# Altium PCB finalpcb.PcbDoc (part 1 of 2)
Units mm, origin at the board's own origin, x right, y up, seen from the top; angles counter-clockwise.
Board outline 242.29 x 217.3 mm, 4 copper layers (Top Layer, Layer 1, Layer 2, Bottom Layer), stack 0.563 mm thick; 53 components, 156 nets, 680 pads, 178 vias.
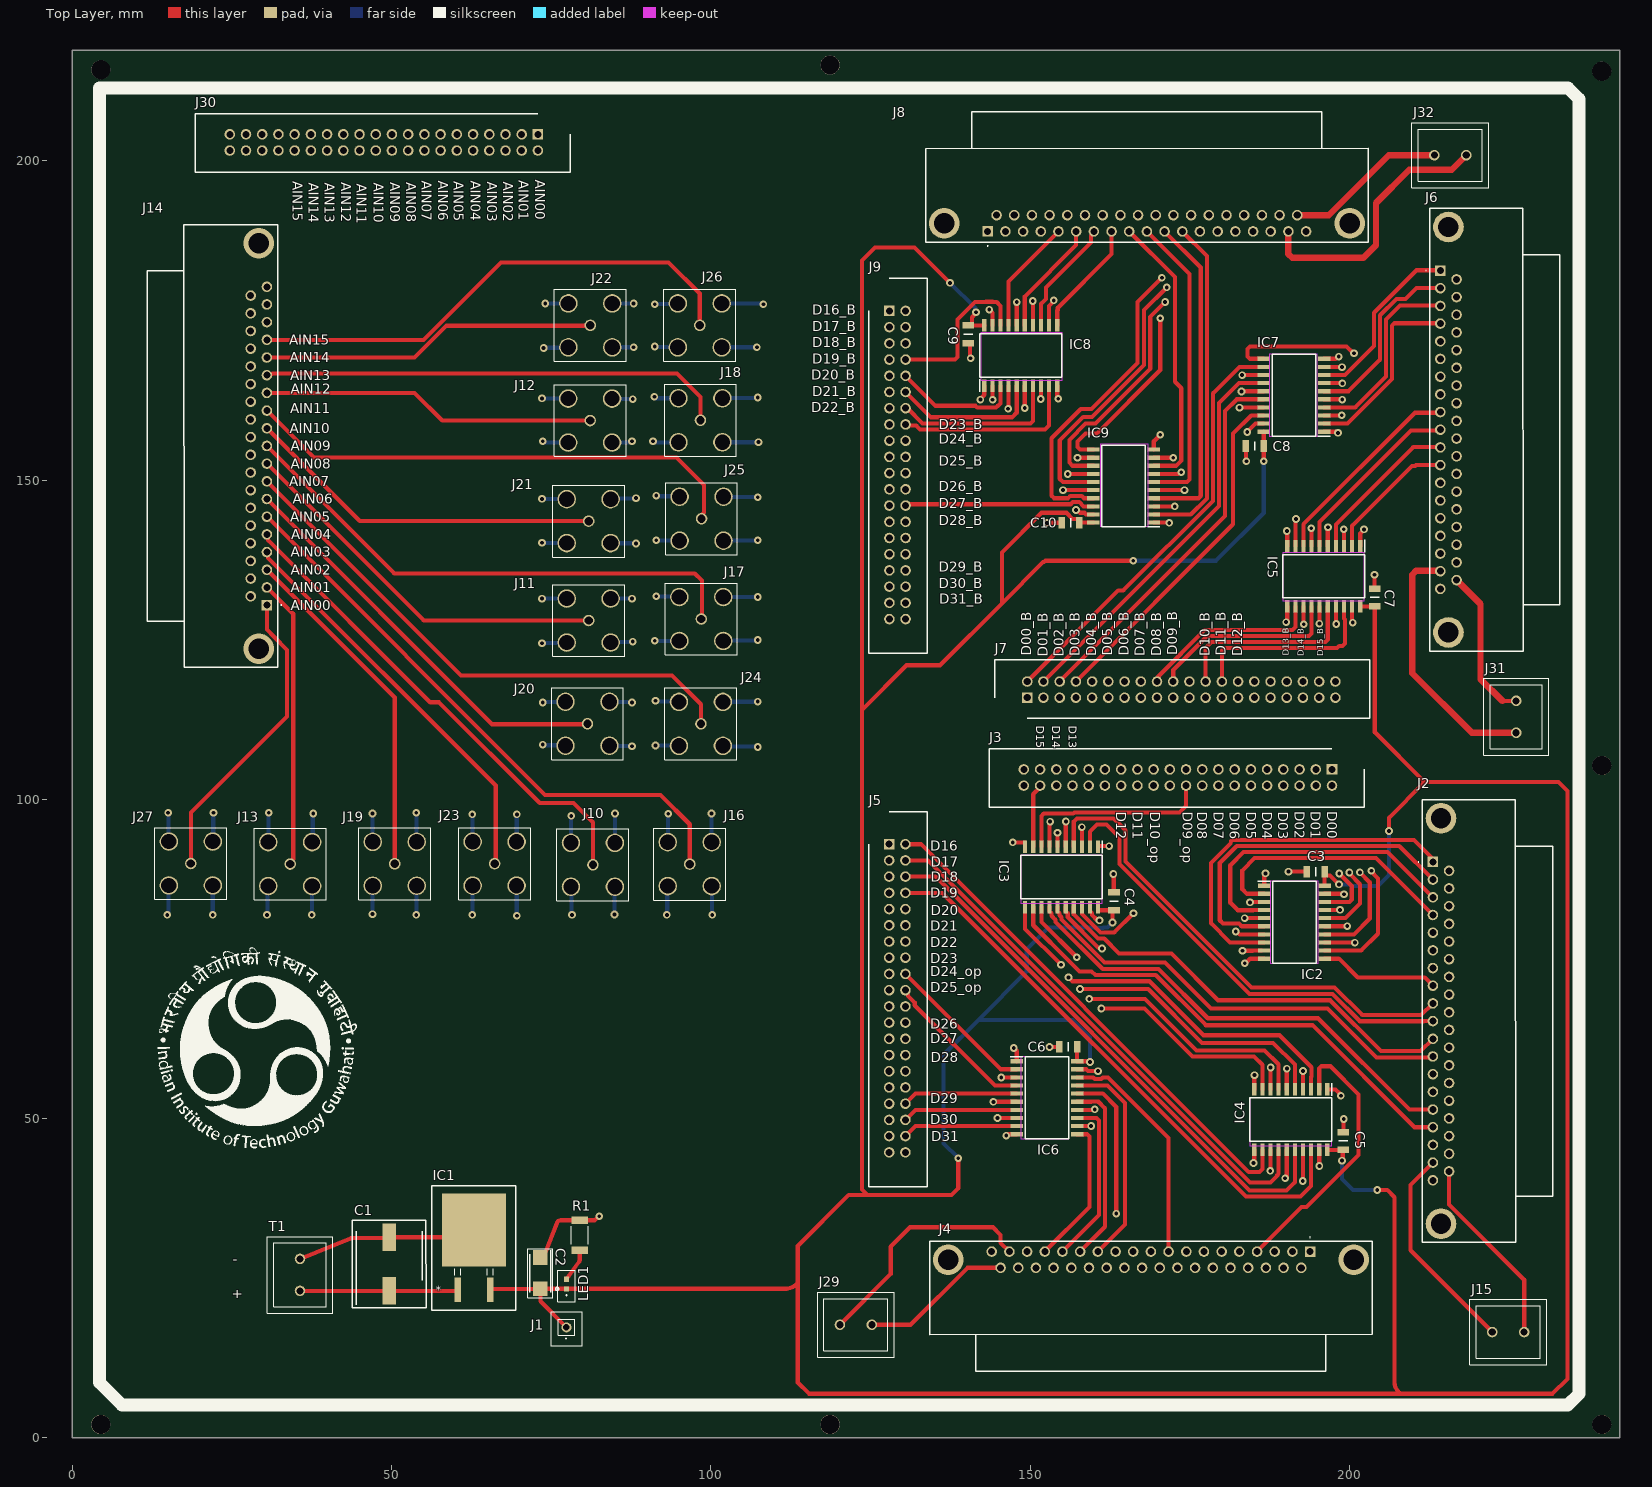
[diagram p0: Top Layer view]
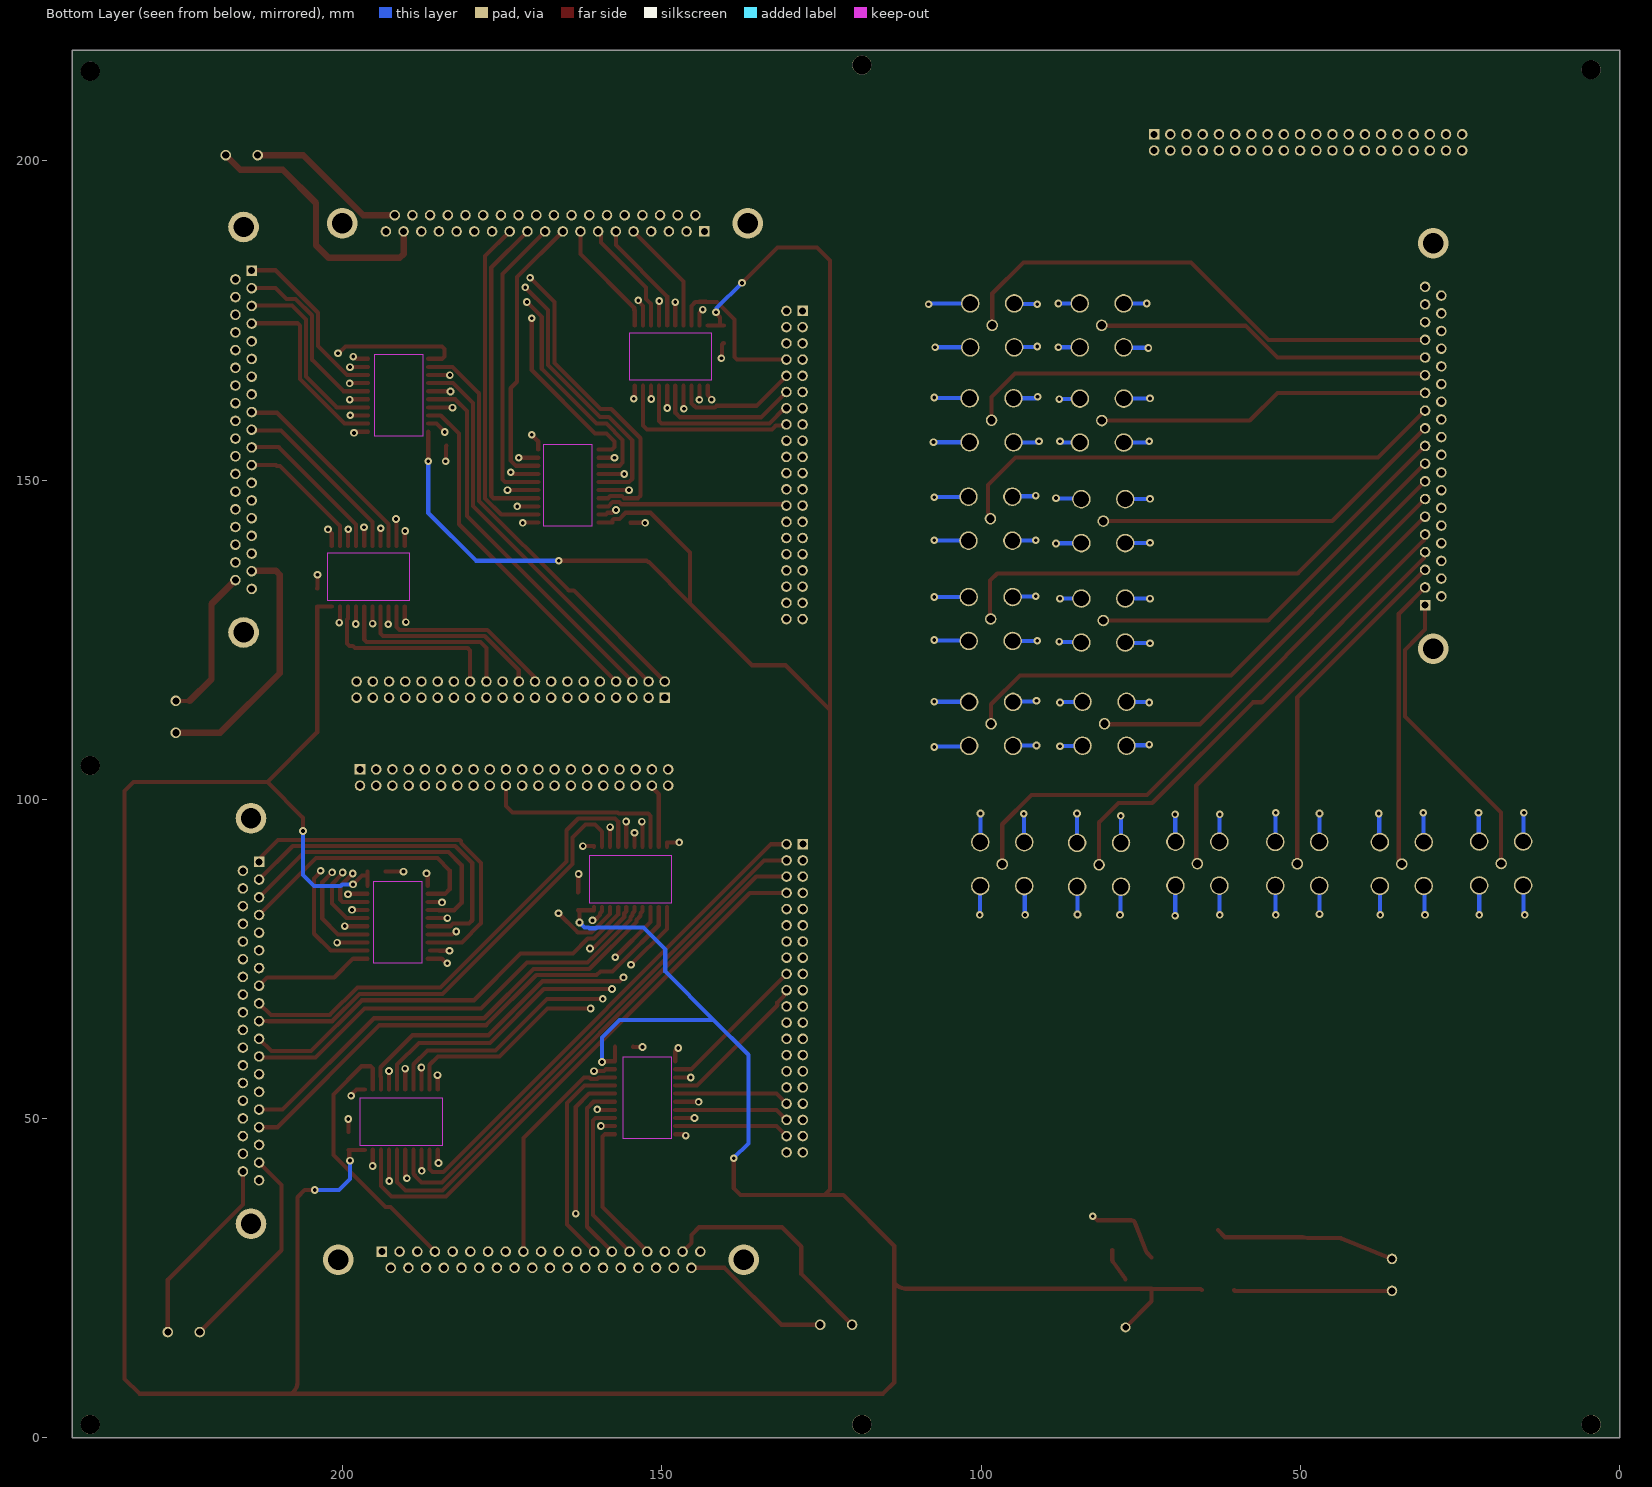
[diagram p1: Bottom Layer view, seen from below]
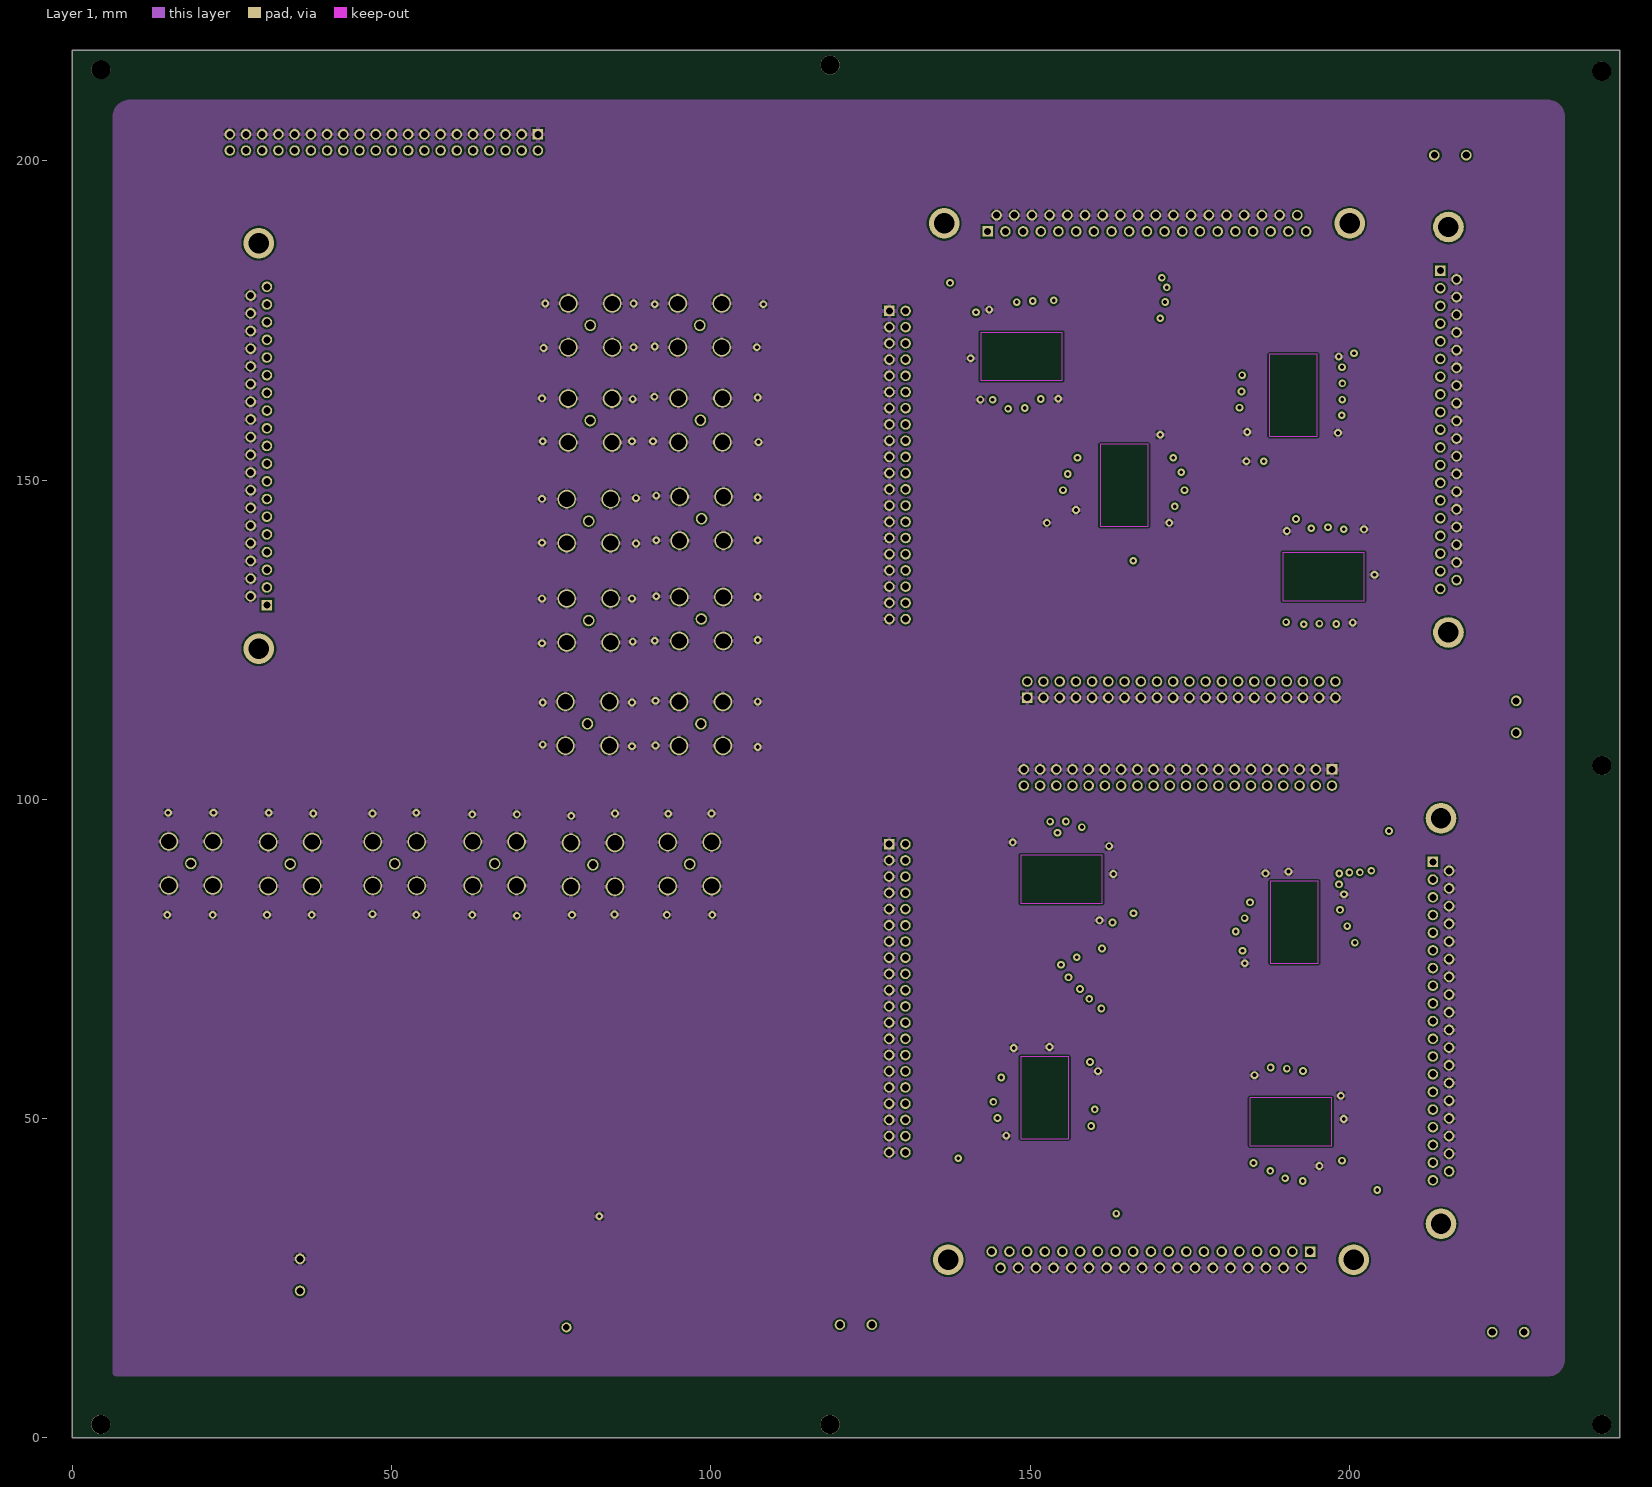
[diagram p2: Layer 1]
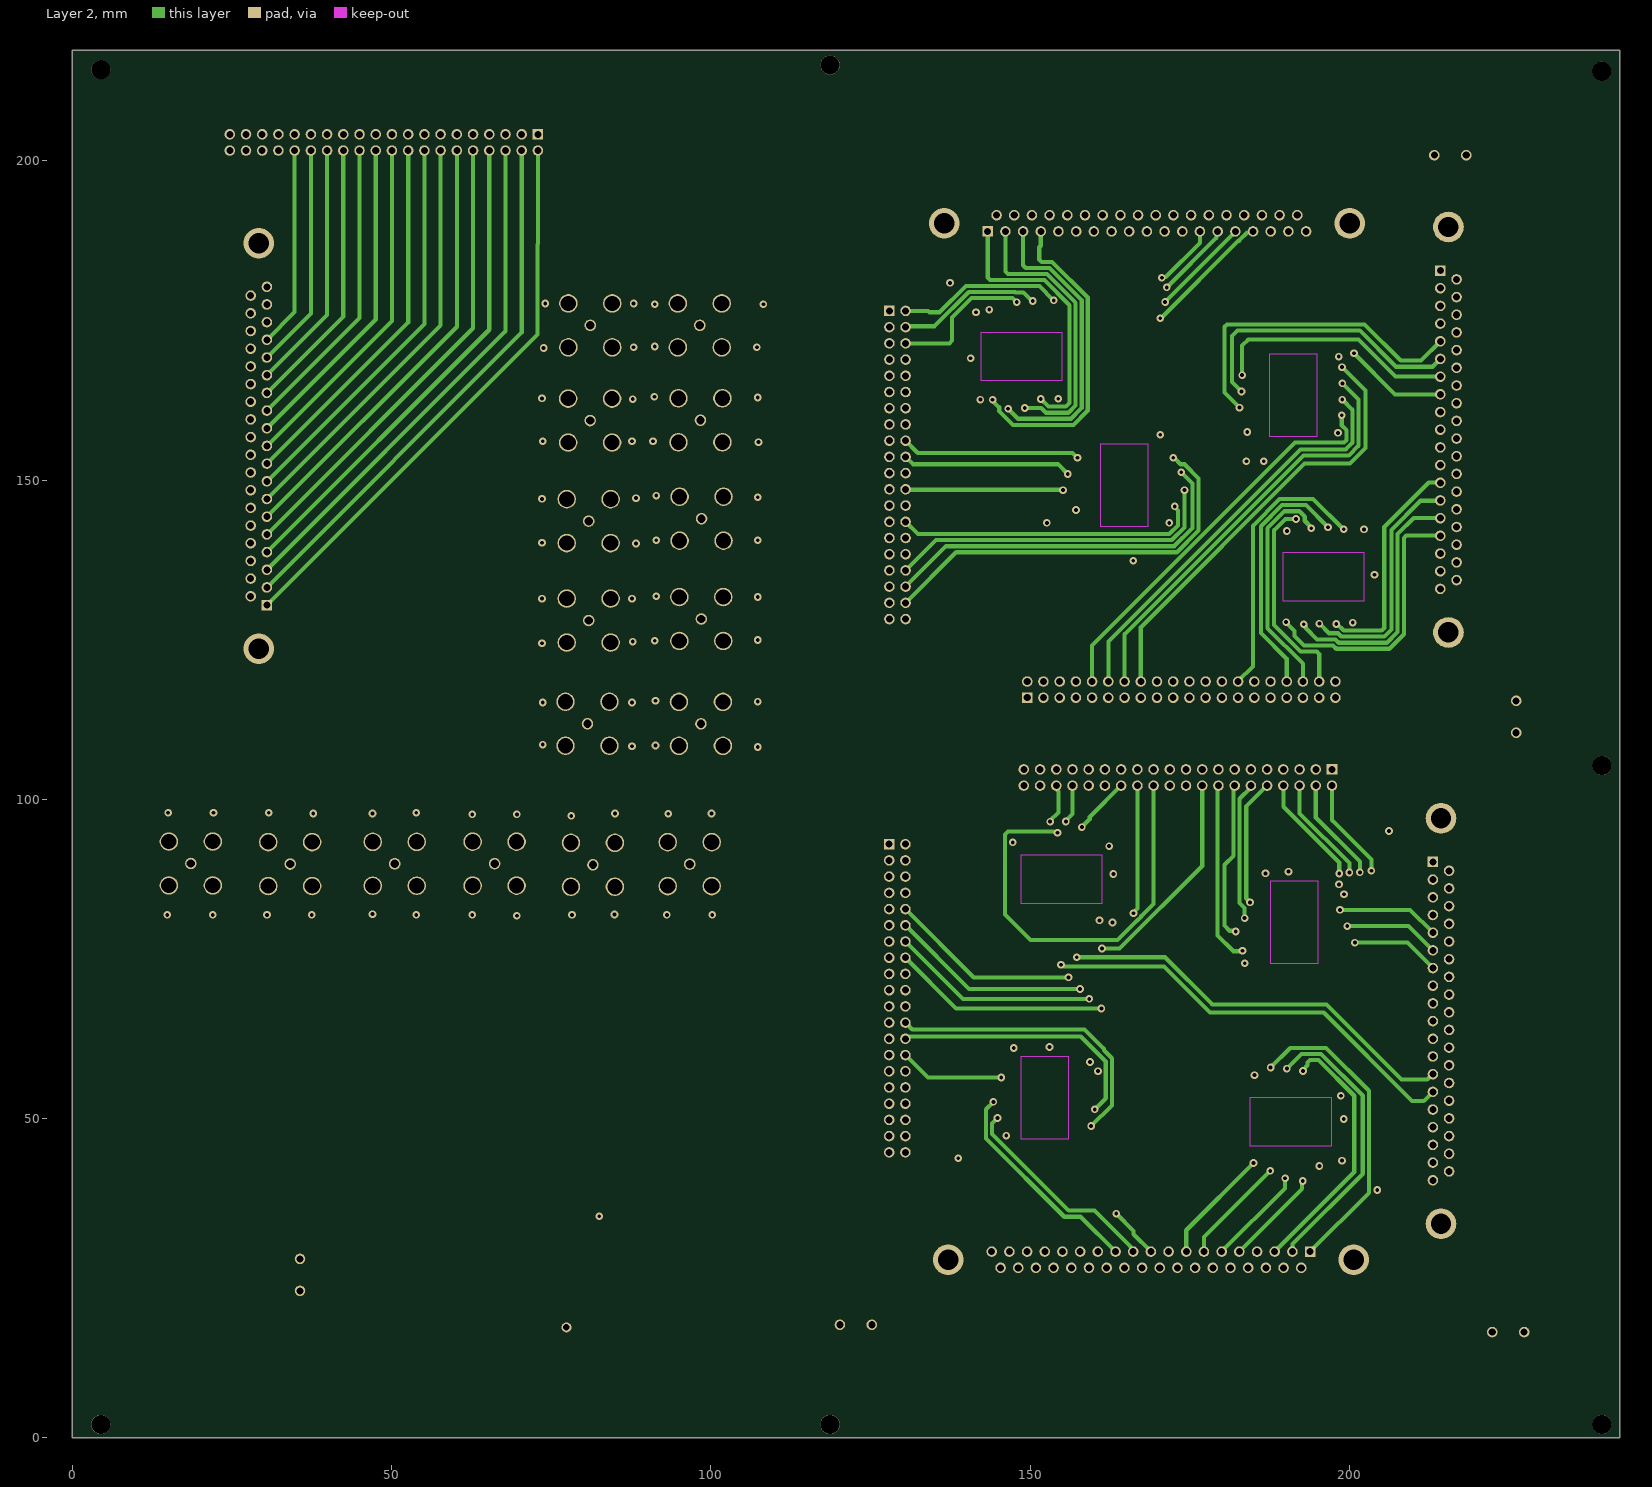
[diagram p3: Layer 2]
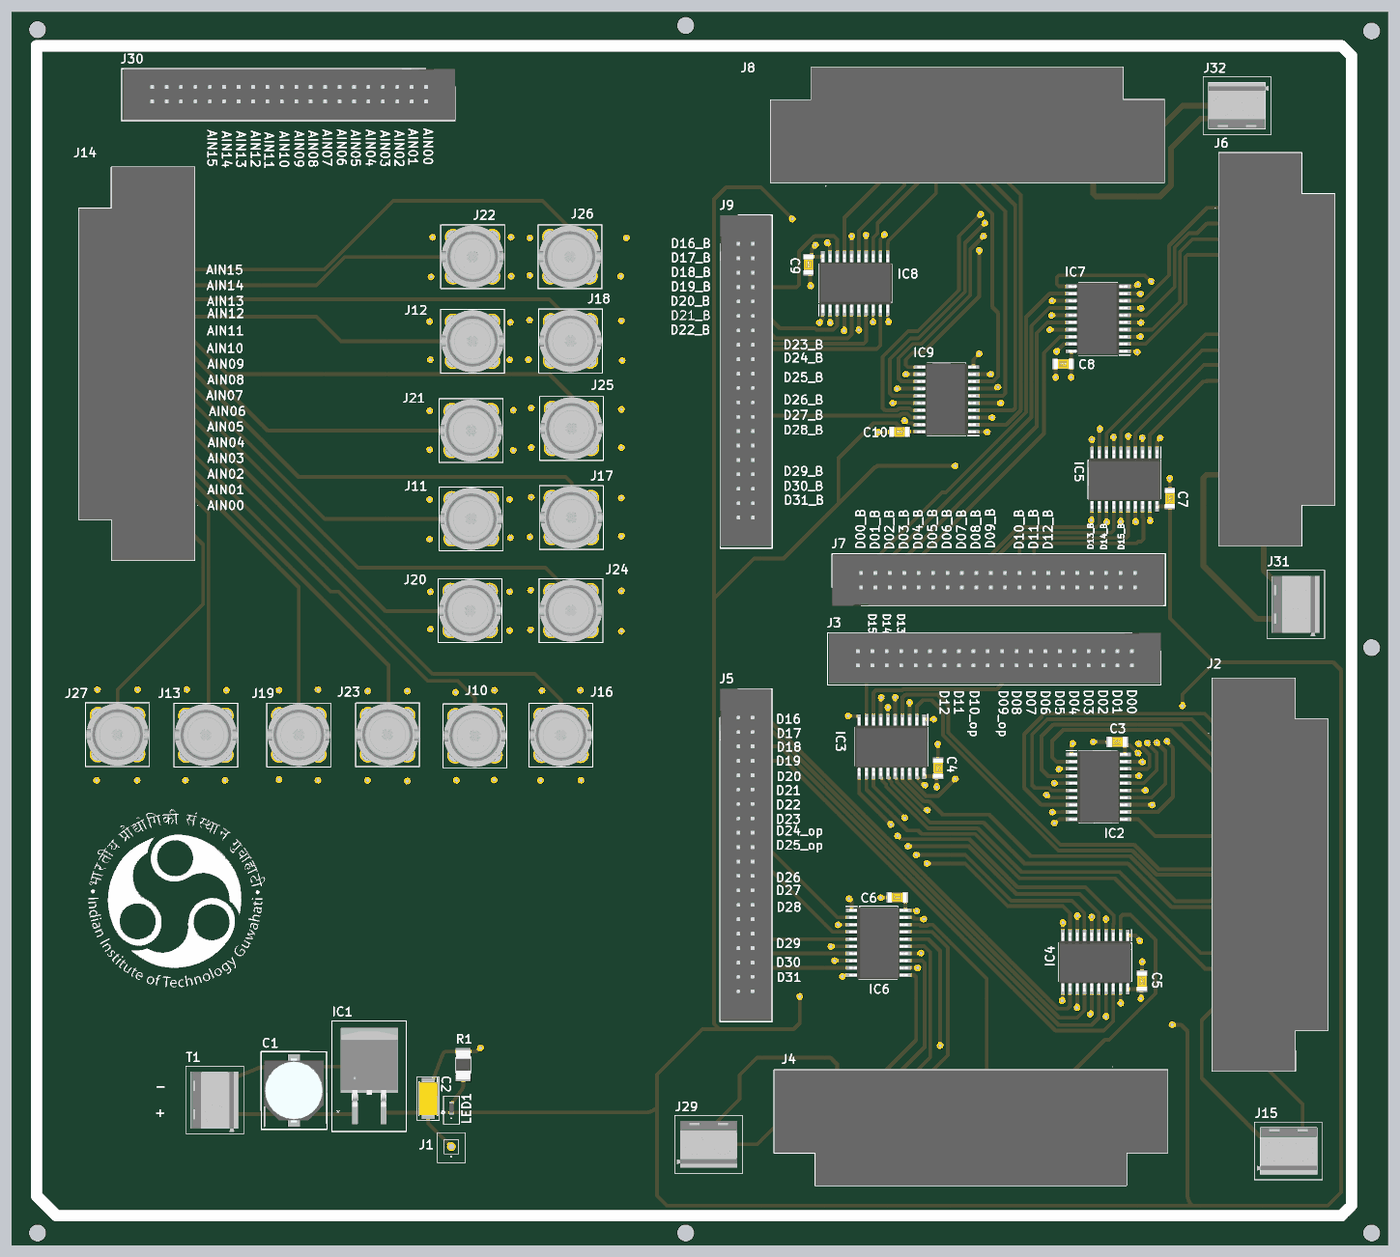
[diagram p5: 3D render of the assembled board from above, using the file's embedded part models]

## Layer stack, top to bottom
Top Solder: solder mask 0.0102, Solder Resist, Dk 3.5
Top Layer: signal copper 0.0356
Dielectric 1: prepreg 0.0508, PP-001, Dk 3.9
Layer 1: signal copper 0.035
Dielectric 2: dielectric 0.32, FR-4, Dk 4.8
Layer 2: signal copper 0.035
Dielectric 3: prepreg 0.0508, PP-001, Dk 3.9
Bottom Layer: signal copper 0.0356
Bottom Solder: solder mask 0.0102, Solder Resist, Dk 3.5

## Board outline
0,0 242.291,0 242.291,217.297 0,217.297

## Design rules (kind name [scope] priority, off if disabled: settings)
AssemblyTestpoint [All] p1: testpointundercomponent=TRUE minsize=1.016 maxsize=2.54 preferedsize=1.524 minholesize=0 maxholesize=1.016 preferedholesize=0.813 testpointgrid=0.025 usegrid=TRUE gridoriginx=6.668 gridoriginy=-50.431 gridtolerance=0 allowsidetop=TRUE allowsidebottom=TRUE
Clearance [All] p1: gap=0.3 ignorepadtopadclearanceinfootprint=FALSE
FabricationTestpoint [All] p1: side=3 testpointundercomponent=TRUE minsize=1.016 maxsize=2.54 preferedsize=1.524 minholesize=0 maxholesize=1.016 preferedholesize=0.813 testpointgrid=0.025 allowsidetop=TRUE allowsidebottom=TRUE usegrid=TRUE gridoriginx=6.668 gridoriginy=-50.431 gridtolerance=0
HoleSize [All] p1: absolutevalues=TRUE maxlimit=3.3 minlimit=0.025 maxpercent=80.000 minpercent=20.000
MinimumAnnularRing [All] p1: minimumring=0.125
MinimumSolderMaskSliver [All] p1: minsoldermaskwidth=0.15
PolygonConnect [All] p1: connectstyle=Relief reliefconductorwidth=0.654 reliefentries=4 polygonreliefangle="90 Angle" airgapwidth=0.254
RoutingVias [All] p1: holewidth=0.6 width=1.2 viastyle="Through Hole" minholewidth=0.5 minwidth=1 maxholewidth=0.711 maxwidth=1.27
SilkToSolderMaskClearance [IsPad] p1: minsilkscreentomaskgap=0.1 clearancetoexposedcopper=TRUE
SolderMaskExpansion [All] p1: expansion=0.102 istentingtop=FALSE
SupplyNets "Schematic Supply Nets" [InNet('GND_R')] p1: voltage=0.000
Width [All] p1: maxlimit=2 minlimit=0.55 preferedwidth=0.65 minimp=50.000000 maximp=50.000000 favimp=50.000000
25 further rules are at their usual default settings.

## Classes and differential pairs
component class pulsewidth2: C7 C8 C9 C10 IC5 IC7 IC8 IC9 J6 J7 J8 J9 J31 J32
component class pulsewidth1: C3 C4 C5 C6 IC2 IC3 IC4 IC6 J2 J3 J4 J5 J15 J29
component class power_supply: C1 C2 IC1 J1 LED1 R1 T1
component class Analog_1_16: J10 J11 J12 J13 J14 J16 J17 J18 J19 J20 J21 J22 J23 J24 J25 J26 J27 J30

## Components (designator, comment, footprint, x,y, rotation, side; value= is the part's Value field where it differs from the comment)
C1 "UUX2A470MNL1GS" CAPAE1030X1050N 49.606,27.238 r90 top value=47µF
C2 "TPSC106K025R0500" CAPPM6032X280N 73.279,25.806 r270 top value=10µF
C3 "C1206C104K5RACTU7990" CAPC3216X88N 194.689,88.697 r180 top
C4 "C1206C104K5RACTU7990" CAPC3216X88N 163.119,84.049 r90 top
C5 "C1206C104K5RACTU7990" CAPC3216X88N 199.034,46.507 r90 top
C6 "C1206C104K5RACTU7990" CAPC3216X88N 155.928,61.265 r180 top
C7 "C1206C104K5RACTU7990" CAPC3216X88N 203.962,131.625 r90 top
C8 "C1206C104K5RACTU7990" CAPC3216X88N 185.162,155.346 r180 top
C9 "C1206C104K5RACTU7990" CAPC3216X88N 140.284,172.845 r270 top
C10 "C1206C104K5RACTU7990" CAPC3216X88N 156.312,143.358 r180 top
IC1 "MC7805CDTG" MC7915ACD2TG 62.89,32.512 r0 top
IC2 "SN74AHC244DW" SOIC127P1030X265-20N 191.364,80.772 r0 top
IC3 "SN74AHC244DW" SOIC127P1030X265-20N 154.915,87.859 r270 top
IC4 "SN74AHC244DW" SOIC127P1030X265-20N 190.805,49.86 r270 top
IC5 "SN74AHC244DW" SOIC127P1030X265-20N 195.961,134.95 r270 top
IC6 "SN74AHC244DW" SOIC127P1030X265-20N 152.603,53.289 r0 top
IC7 "SN74AHC244DW" SOIC127P1030X265-20N 191.287,163.297 r180 top
IC8 "SN74AHC244DW" SOIC127P1030X265-20N 148.514,169.52 r90 top
IC9 "SN74AHC244DW" SOIC127P1030X265-20N 164.617,149.073 r180 top
J1 "TSW-101-07-G-S" TSW-101-XX-YY-S 77.368,17.323 r0 top
J2 "L77SDC37S1ACH3R" L77SDC37S1ACH3R 213.055,90.213 r90 top
J3 "T821140A1S100CEU" SHDR40W64P254X254_2X20_5842X895X915P 197.256,104.699 r180 top
J4 "L77SDC37S1ACH3R" L77SDC37S1ACH3R 193.827,29.185 r0 top
J5 "T821140A1S100CEU" SHDR40W64P254X254_2X20_5842X895X915P 127.914,92.989 r270 top
J6 "L77SDC37S1ACH3R" L77SDC37S1ACH3R 214.224,182.83 r90 top
J7 "T821140A1S100CEU" SHDR40W64P254X254_2X20_5842X895X915P 149.53,115.926 r0 top
J8 "L77SDC37S1ACH3R" L77SDC37S1ACH3R 143.341,188.951 r180 top
J9 "T821140A1S100CEU" SHDR40W64P254X254_2X20_5842X895X915P 127.94,176.505 r270 top
J10 "031-5329-51RFX" CONN1_031-5329-51RFX_AMP 81.509,89.764 r0 top
J11 "031-5329-51RFX" CONN1_031-5329-51RFX_AMP 80.848,128.016 r0 top
J12 "031-5329-51RFX" CONN1_031-5329-51RFX_AMP 81.077,159.334 r0 top
J13 "031-5329-51RFX" CONN1_031-5329-51RFX_AMP 34.099,89.878 r0 top
J14 "L77SDC37S1ACH3R" L77SDC37S1ACH3R 30.455,130.427 r270 top
J15 "282836-2" 2828362 227.355,16.586 r0 top
J16 "031-5329-51RFX" CONN1_031-5329-51RFX_AMP 96.672,89.865 r0 top
J17 "031-5329-51RFX" CONN1_031-5329-51RFX_AMP 98.489,128.257 r0 top
J18 "031-5329-51RFX" CONN1_031-5329-51RFX_AMP 98.349,159.385 r0 top
J19 "031-5329-51RFX" CONN1_031-5329-51RFX_AMP 50.47,89.916 r0 top
J20 "031-5329-51RFX" CONN1_031-5329-51RFX_AMP 80.658,111.849 r0 top
J21 "031-5329-51RFX" CONN1_031-5329-51RFX_AMP 80.848,143.586 r0 top
J22 "031-5329-51RFX" CONN1_031-5329-51RFX_AMP 81.102,174.244 r0 top
J23 "031-5329-51RFX" CONN1_031-5329-51RFX_AMP 66.116,89.941 r0 top
J24 "031-5329-51RFX" CONN1_031-5329-51RFX_AMP 98.425,111.836 r0 top
J25 "031-5329-51RFX" CONN1_031-5329-51RFX_AMP 98.527,143.967 r0 top
J26 "031-5329-51RFX" CONN1_031-5329-51RFX_AMP 98.247,174.244 r0 top
J27 "031-5329-51RFX" CONN1_031-5329-51RFX_AMP 18.542,89.967 r0 top
J29 "282836-2" 2828362 125.193,17.729 r0 top
J30 "T821140A1S100CEU" SHDR40W64P254X254_2X20_5842X895X915P 72.898,204.165 r180 top
J31 "282836-2" 2828362 226.111,115.443 r90 top
J32 "282836-2" 2828362 213.284,200.889 r180 top
LED1 "MP008251" SM0603SRC 77.368,24.106 r0 top
R1 "CRCW2010100KFKEF" RESC5025X71N 79.451,31.75 r270 top
T1 "282836-2" 2828362 35.636,28.038 r90 top

## Footprints (in the part's own frame and the unit in brackets; to place one, negate y for a bottom-side part, rotate by r counter-clockwise, add the part's x,y. Pads: shape width x height; smd on the part's side, far side on the other; paste and mask are expansions set on the pad)
2828362 [mm]
  round 1.65 hole 1.1: 1(0,0) 2(-5,0)
  silkscreen extent -8.5,-5.1 3.5,5.1, body extent -8.09,-4.1 2.51,4.1, height 10.02
CAPAE1030X1050N [mm]
  rect 4.3x2.15 smd: 1(-4.2,0) 2(4.2,0)
  silkscreen extent -6.85,-5.82 6.85,5.77, body extent -5.65,-5.25 5.65,5.25, height 10.5
CAPC3216X88N [mm]
  rect 1.02x1.82 smd: 1(-1.4,0) 2(1.4,0)
  silkscreen extent 0,-0.7 0,0.7, body extent -1.7,-0.9 1.7,0.9, height 0.88
CAPPM6032X280N [mm]
  rect 2.3x2.3 smd: 1(-2.45,0) 2(2.45,0)
  silkscreen extent -3.85,-1.95 3.88,2.86, body extent -3,-1.63 3,1.63, height 2.8
CONN1_031-5329-51RFX_AMP [mil]
  round 71 / inner round 70.98 / far side round 71 hole 51 paste-99999 mask+0: 1(0,0)
  round 114 / inner round 114.02 / far side round 114 hole 94 paste-99999 mask+0: 2(-135.5,135.5) 3(-135.5,-135.5) 4(135.5,-135.5) 5(135.5,135.5)
  silkscreen extent -222,-222 222,222, body extent -217,-216 217,217, height 611
L77SDC37S1ACH3R [mm]
  rect 1.65x1.65 hole 1.1: 1(0,0)
  round 1.65 hole 1.1: 2(-2.77,0) 3(-5.54,0) 4(-8.31,0) 5(-11.08,0) 6(-13.85,0) 7(-16.62,0) 8(-19.39,0) 9(-22.16,0) 10(-24.93,0) 11(-27.7,0) 12(-30.47,0) 13(-33.24,0) 14(-36.01,0) 15(-38.78,0) 16(-41.55,0) 17(-44.32,0) 18(-47.09,0) 19(-49.86,0) 20(-1.385,-2.54) 21(-4.155,-2.54) 22(-6.925,-2.54) 23(-9.695,-2.54) 24(-12.465,-2.54) 25(-15.235,-2.54) 26(-18.005,-2.54) 27(-20.775,-2.54) 28(-23.545,-2.54) 29(-26.315,-2.54) 30(-29.085,-2.54) 31(-31.855,-2.54) 32(-34.625,-2.54) 33(-37.395,-2.54) 34(-40.165,-2.54) 35(-42.935,-2.54) 36(-45.705,-2.54) 37(-48.475,-2.54)
  round 4.8 hole 3.2: MH1(6.82,-1.27) MH2(-56.68,-1.27)
  silkscreen extent -59.6,-18.74 9.73,2.3, body extent -59.59,-18.74 9.73,1.66, height 13.03
MC7915ACD2TG [mil]
  rect 40x150 smd paste+0 mask+0: 1(-100,-367) 3(100,-367)
  rect 397x450 smd paste+0 mask+0: 2(0,2)
  silkscreen extent -260,-492 256,276, body extent -196,-321 196,205, height 190
RESC5025X71N [mil]
  rect 47x104 smd: 1(-92,0) 2(92,0)
  silkscreen extent -55,-52 55,52, body extent -100,-50 100,50, height 26
SHDR40W64P254X254_2X20_5842X895X915P [mm]
  rect 1.65x1.65 hole 1.1: 1(0,0)
  round 1.65 hole 1.1: 2(0,2.54) 3(2.54,0) 4(2.54,2.54) 5(5.08,0) 6(5.08,2.54) 7(7.62,0) 8(7.62,2.54) 9(10.16,0) 10(10.16,2.54) 11(12.7,0) 12(12.7,2.54) 13(15.24,0) 14(15.24,2.54) 15(17.78,0) 16(17.78,2.54) 17(20.32,0) 18(20.32,2.54) 19(22.86,0) 20(22.86,2.54) 21(25.4,0) 22(25.4,2.54) 23(27.94,0) 24(27.94,2.54) 25(30.48,0) 26(30.48,2.54) 27(33.02,0) 28(33.02,2.54) 29(35.56,0) 30(35.56,2.54) 31(38.1,0) 32(38.1,2.54) 33(40.64,0) 34(40.64,2.54) 35(43.18,0) 36(43.18,2.54) 37(45.72,0) 38(45.72,2.54) 39(48.26,0) 40(48.26,2.54)
  silkscreen extent -5.08,-3.2 53.64,5.94, body extent -5.08,-3.2 53.34,5.74, height 9.15
SM0603SRC [mm]
  rect 0.8x0.8 smd: 1(0,-0.75) 2(0,0.75)
  silkscreen extent -1.4,-2.8 1.4,2.15, body extent -0.4,-0.8 0.4,0.8, height 0.9
SOIC127P1030X265-20N [mm]
  rect 1.95x0.65 smd: 1(-4.725,5.715) 2(-4.725,4.445) 3(-4.725,3.175) 4(-4.725,1.905) 5(-4.725,0.635) 6(-4.725,-0.635) 7(-4.725,-1.905) 8(-4.725,-3.175) 9(-4.725,-4.445) 10(-4.725,-5.715) 11(4.725,-5.715) 12(4.725,-4.445) 13(4.725,-3.175) 14(4.725,-1.905) 15(4.725,-0.635) 16(4.725,0.635) 17(4.725,1.905) 18(4.725,3.175) 19(4.725,4.445) 20(4.725,5.715)
  silkscreen extent -5.7,-6.4 3.4,6.4, body extent -5.16,-6.4 5.16,6.4, height 1.75
TSW-101-XX-YY-S [mm]
  round 1.55 hole 1.02: 1(0,0)
  silkscreen extent -2.48,-2.85 2.47,2.48

## Part data
C1: library part CMP-001-00092-1, "Capacitor, Radial  / Can - SMD, 47 µF,  / 100 V, 2000 hours  / @ 105°C, Polar Surface Mount  / Tantalum", Manufacturer_Name=Nichicon, Mouser Part Number=647-UUX2A470MNL1GS, Arrow Part Number=UUX2A470MNL1GS, Arrow Price/Stock=https://www.arrow.com/en/products/uux2a470mnl1gs/nichicon, Component Type=Standard, Datasheet Link=https://componentsearchengine.com/Datasheets/1/UUX2A470MNL1GS.pdf, Design Item ID=UUX2A470MNL1GS, Height=10.5mm, Manufacturer_Part_Number=UUX2A470MNL1GS, Mouser Price/Stock=https://www.mouser.co.uk/ProductDetail/Nichicon/UUX2A470MNL1GS?qs=jZZh9D7uMhmPZMofMKn2Fg%3D%3D, Pins=2, Source=Schlib1.SchLib
C2: library part CMP-001-00091-1, "Capacitor, 10 µF,  / 25 V, 2312 [6032  / Metric], ± 10%, 0.5  / ohm, C", Manufacturer_Name=AVX, Mouser Part Number=581-TPSC106K025R0500, Arrow Part Number=TPSC106K025R0500, Arrow Price/Stock=https://www.arrow.com/en/products/tpsc106k025r0500/avx?region=nac, Component Type=Standard, Datasheet Link=https://componentsearchengine.com/Datasheets/2/TPSC106K025R0500.pdf, Design Item ID=TPSC106K025R0500, Height=2.8mm, Manufacturer_Part_Number=TPSC106K025R0500, Mouser Price/Stock=https://www.mouser.co.uk/ProductDetail/AVX/TPSC106K025R0500?qs=xw8XwkEH2YWjgnPlag1OVw%3D%3D, Pins=2, Source=Schlib1.SchLib
C3 C4 C5 C6 C7 C8 C9 C10: "Capacitor", Manufacturer_Name=KEMET, Arrow Part Number=C1206C104K5RACTU7990, Arrow Price/Stock=https://www.arrow.com/en/products/c1206c104k5ractu7990/kemet-corporation?utm_currency=USD&region=nac, Datasheet Link=https://api.kemet.com/component-edge/download/specsheet/C1206C104K5RACTU.pdf, Height=0.88mm, Manufacturer_Part_Number=C1206C104K5RACTU7990
IC1: library part CMP-031-00039-1, "Integrated Circuit", Manufacturer_Name=onsemi, Mouser Part Number=863-MC7805CDTG, Arrow Part Number=MC7805CDTG, Arrow Price/Stock=https://www.arrow.com/en/products/mc7805cdtg/on-semiconductor?region=europe, Datasheet Link=https://www.onsemi.com/pdf/datasheet/mc7800-d.pdf, Design Item ID=MC7805CDTG, Height=2.51mm, Manufacturer_Part_Number=MC7805CDTG, Mouser Price/Stock=https://www.mouser.co.uk/ProductDetail/onsemi/MC7805CDTG?qs=%252B9%2Fcbd0IE0RdeBGvK4GFRg%3D%3D, Source=RIL_SCH.SchLib
IC2 IC3 IC4 IC5 IC6 IC7 IC8 IC9: "Integrated Circuit", Manufacturer_Name="Texas Instruments", Mouser Part Number=595-SN74AHC244DW, Arrow Part Number=SN74AHC244DW, Arrow Price/Stock=https://www.arrow.com/en/products/sn74ahc244dw/texas-instruments?region=nac, Datasheet Link=https://datasheet.datasheetarchive.com/originals/distributors/Datasheets-301/18405.pdf, Height=2.65mm, Manufacturer_Part_Number=SN74AHC244DW, Mouser Price/Stock=https://www.mouser.co.uk/ProductDetail/Texas-Instruments/SN74AHC244DW?qs=j%2FZo4ajzVJKtLyxm%252BX3lew%3D%3D
J1: library part CMP-002-00078-1, "Connector", Manufacturer_Name=SAMTEC, Mouser Part Number=200-TSW10107GS, Arrow Part Number=TSW-101-07-G-S, Arrow Price/Stock=https://www.arrow.com/en/products/tsw-101-07-g-s/samtec?region=europe, Component Type=Standard, Datasheet Link=http://suddendocs.samtec.com/prints/tsw-xxx-xx-xxx-x-xx-xxx-mkt.pdf, Design Item ID=TSW-101-07-G-S, Manufacturer_Part_Number=TSW-101-07-G-S, Mouser Price/Stock=https://www.mouser.co.uk/ProductDetail/Samtec/TSW-101-07-G-S?qs=hzq9O0YpnZscfPe5oPvABA%3D%3D, Pins=1, Source=Schlib1.SchLib
J2 J4 J6 J8 J14: "Connector", Manufacturer_Name=Amphenol, Mouser Part Number=523-L77SDC37S1ACH3R, Datasheet Link=https://cdn.amphenol-cs.com/media/wysiwyg/files/drawing/l77sdxxxs1ach3r.pdf, Height=12.93mm, Manufacturer_Part_Number=L77SDC37S1ACH3R, Mouser Price/Stock=https://www.mouser.co.uk/ProductDetail/Amphenol-Commercial-Products/L77SDC37S1ACH3R?qs=mq7kV%2Fq8lk7HpO2gUh7qRA%3D%3D
J3 J5 J7 J9 J30: "Connector", Manufacturer_Name=Amphenol, Mouser Part Number=N/A, Arrow Part Number=T821140A1S100CEU, Arrow Price/Stock=https://www.arrow.com/en/products/t821140a1s100ceu/amphenol-fci?region=europe, Datasheet Link=http://www.farnell.com/datasheets/1648843.pdf, Height=9.15mm, Manufacturer_Part_Number=T821140A1S100CEU, Mouser Price/Stock=https://www.mouser.co.uk/ProductDetail/Amphenol/T821140A1S100CEU?qs=%252BRAvXJslkuDIVA7vEt1SFA%3D%3D
J10 J11 J12 J13 J16 J17 J18 J19 J20 J21 J22 J23 J24 J25 J26 J27: "No Description Available", Mfr_Name="Amphenol ICC", RefDes=RefDes, Type=Type
J15 J29 J31 J32: "Connector", Manufacturer_Name="TE Connectivity", Mouser Part Number=571-2828362, Arrow Part Number=282836-2, Arrow Price/Stock=https://www.arrow.com/en/products/282836-2/te-connectivity?utm_currency=USD&region=nac, Datasheet Link=https://www.te.com/commerce/DocumentDelivery/DDEController?Action=srchrtrv&DocNm=1-1773458-1_EURO_STYLE_QRG&DocType=Data%20Sheet&DocLang=English&PartCntxt=282836-2&DocFormat=pdf, Height=10mm, Manufacturer_Part_Number=282836-2, Mouser Price/Stock=https://www.mouser.co.uk/ProductDetail/TE-Connectivity/282836-2?qs=A%252Bip%252BNCYi6Ohx9vaQ1l4dg%3D%3D
LED1: library part CMP-007-00046-1, "LED", Component Type=Standard, Design Item ID=MP008251, Pins=2, Source=Schlib1.SchLib
R1: library part CMP-009-00182-1, "Resistor", Manufacturer_Name=Vishay, Mouser Part Number=71-CRCW2010-100K-E3, Component Type=Standard, Design Item ID=CRCW2010100KFKEF, Manufacturer_Part_Number=CRCW2010100KFKEF, Mouser Price/Stock=https://www.mouser.co.uk/ProductDetail/Vishay-Dale/CRCW2010100KFKEF?qs=uSoEc56oFvqZsApDXVXFjw%3D%3D, Pins=2, Source=Schlib1.SchLib
T1: library part CMP-012-00011-1, "Connector", Manufacturer_Name="TE Connectivity", Mouser Part Number=571-2828362, Arrow Part Number=282836-2, Arrow Price/Stock=https://www.arrow.com/en/products/282836-2/te-connectivity?region=europe, Component Type=Standard, Datasheet Link=https://www.te.com/commerce/DocumentDelivery/DDEController?Action=showdoc&DocId=Customer+Drawing%7F282836%7FJ%7Fpdf%7FEnglish%7FENG_CD_282836_J.pdf%7F282836-2, Design Item ID=282836-2, Height=10mm, Manufacturer_Part_Number=282836-2, Mouser Price/Stock=https://www.mouser.co.uk/ProductDetail/TE-Connectivity/282836-2?qs=A%252Bip%252BNCYi6Ohx9vaQ1l4dg%3D%3D, Pins=2, Source=Schlib1.SchLib

## Free pads (board coordinates)
  round 3 hole 3 unplated: 1(4.445,2.108) 1(118.643,2.108) 1(118.643,215.011) 1(239.497,2.108) 1(239.497,105.308) 1(239.497,214.046) 2(4.445,214.274)

## Via types
v1: diameter 1.2, hole 0.6, Top Layer to Bottom Layer, 178 vias

## Nets (pads, with @x,y where several pads share a name; then routed paths per layer and width w, separated by ;. In a path a pad name is that pad's centre, name@x,y a point inside that pad or via, vN(x,y) a via of type N, cw(c..) or ccw(c..) an arc to the next point about the centre after c; other vN are vias at no path point)
+5V: C2.2 C3.1 C4.1 C5.1 C6.1 C7.1 C8.1 C9.1 C10.1 IC1.3 IC2.20 IC3.20 IC4.20 IC5.20 IC6.20 IC7.20 IC8.20 IC9.20 J1.1 LED1.1 | length 834.8
  Top Layer w0.65: IC1.3@65.43,23.19 65.613,23.339 72.454,23.339 C2.2@73.279,23.356 ; J1.1@77.368,17.323 73.279,21.412 C2.2@73.279,23.356 ; v1(137.439,180.899) 131.877,186.461 125.705,186.461 123.647,184.404 123.647,114.021 ; v1(138.735,43.815) 138.735,39.116 137.668,38.049 124.536,38.049 ; C9.1@140.284,174.245 C9.1@140.684,174.245 ; v1(141.503,176.301) 141.503,176.153 140.869,175.518 140.869,174.43 C9.1@140.684,174.245 ; IC8.20@142.799,174.245 C9.1@140.684,174.245 ; C6.1@157.328,61.265 IC6.20@157.328,59.004 159.092,59.004 159.213,58.883 v1(159.361,58.883) ; IC9.20@159.892,143.358 C10.1@157.712,143.358 157.712,143.758 157.527,143.943 156.63,143.943 155.68,144.893 151.776,144.893 145.556,138.673 145.556,130.697 ; IC3.20@160.63,83.134 160.63,82.649 C4.1@163.119,82.649 163.075,82.649 162.89,82.464 v1(162.89,80.721) ; v1(166.141,137.389) 152.4,137.389 152.171,137.16 152.019,137.16 145.556,130.697 ; C8.1@186.562,155.346 IC7.20@186.562,157.582 ; v1(186.563,152.959) C8.1@186.562,155.346 ; IC2.20@196.089,86.487 C3.1@196.089,88.297 ; C3.1@196.089,88.697 C3.1@196.089,88.297 ; IC4.20@196.52,45.107 C5.1@199.034,45.107 198.933,45.006 198.933,43.536 v1(198.831,43.434) ; v1(198.362,86.691) 196.942,88.112 196.274,88.112 C3.1@196.089,88.297 ; IC5.20@201.676,130.225 C7.1@203.962,130.225 203.962,110.515 211.76,102.718 ; v1(204.343,38.837) 204.369,38.811 205.918,38.811 207.035,37.694 207.035,8.875 ccw(c209.575,8.875) 207.779,7.079 207.924,6.934 ; v1(206.172,95.047) 206.162,95.057 206.162,97.119 211.76,102.718 ; C2.2@73.279,23.356 LED1.1@77.368,23.356 111.611,23.356 ccw(c111.611,25.896) 113.407,24.1 113.589,24.282 ; 113.589,24.282 113.589,30.074 121.564,38.049 124.536,38.049 ; 113.589,24.282 113.589,8.712 115.367,6.934 207.924,6.934 ; 123.647,114.021 123.647,38.938 124.536,38.049 ; 123.647,114.021 130.645,121.019 135.878,121.019 145.556,130.697 ; 207.924,6.934 231.8,6.934 234.112,9.246 234.112,101.346 232.74,102.718 211.76,102.718
  Bottom Layer w0.65: v1(137.439,180.899) 141.398,176.94 141.398,176.407 v1(141.503,176.301) ; v1(138.735,43.815) 136.413,46.137 136.413,60.01 141.874,65.471 ; v1(159.361,58.883) 159.361,62.716 156.606,65.471 141.874,65.471 ; v1(162.89,80.721) 162.103,79.934 161.448,79.934 161.343,79.829 160.328,79.829 160.223,79.934 152.857,79.934 149.443,76.52 149.443,73.04 141.874,65.471 ; v1(166.141,137.389) 179.07,137.389 186.563,144.882 v1(186.563,152.959) ; v1(198.362,86.691) 200.033,86.691 200.262,86.462 204.47,86.462 206.172,88.163 v1(206.172,95.047) ; v1(198.831,43.434) 198.831,40.564 200.558,38.837 v1(204.343,38.837)
+15V: C1.1 IC1.1 T1.2 | length 24.8
  Top Layer w0.65: T1.2@35.636,23.038 C1.1@49.606,23.038 60.198,23.038 ccw(c60.198,23.19) IC1.1@60.35,23.19
AIN00: J14.1 J27.1 J30.2 | length 136.8
  Top Layer w0.65: J27.1@18.542,89.967 18.542,97.929 33.619,113.006 33.619,123.429 31.528,125.52 31.528,125.542 30.455,126.615 J14.1@30.455,130.427
  Layer 2 w0.65: J14.1@30.455,130.427 72.816,172.788 72.816,186.935 72.898,187.017 J30.2@72.898,201.625
AIN01: J13.1 J14.2 J30.4 | length 130.2
  Top Layer w0.65: J14.2@30.455,133.197 34.569,129.082 34.569,90.66 34.099,90.19 J13.1@34.099,89.878
  Layer 2 w0.65: J14.2@30.455,133.197 70.358,173.1 J30.4@70.358,201.625
AIN02: J14.3 J19.1 J30.6 | length 135.5
  Top Layer w0.65: J14.3@30.455,135.967 50.47,115.952 J19.1@50.47,89.916
  Layer 2 w0.65: J14.3@30.455,135.967 67.818,173.33 J30.6@67.818,201.625
AIN03: J14.4 J23.1 J30.8 | length 140.8
  Top Layer w0.65: J14.4@30.455,138.737 30.646,138.546 30.646,137.826 66.294,102.178 J23.1@66.294,90.094
  Layer 2 w0.65: J14.4@30.455,138.737 65.278,173.56 J30.8@65.278,201.625
AIN04: J10.1 J14.5 J30.10 | length 150.4
  Top Layer w0.65: J14.5@30.455,141.507 30.646,141.316 30.646,140.596 56.033,115.209 57.42,115.209 73.188,99.441 78.486,99.441 81.509,96.418 81.509,90.018 J10.1@81.763,89.764
  Layer 2 w0.65: J14.5@30.455,141.507 62.738,173.79 J30.10@62.738,201.625
AIN05: J14.6 J16.1 J30.12 | length 162.1
  Top Layer w0.65: J14.6@30.455,144.277 74.021,100.711 92.075,100.711 96.672,96.114 J16.1@96.672,89.865
  Layer 2 w0.65: J14.6@30.455,144.277 60.198,174.02 J30.12@60.198,201.625
AIN06: J14.7 J20.1 J30.14 | length 130.5
  Top Layer w0.65: J14.7@30.455,147.047 65.729,111.773 J20.1@80.531,111.773
  Layer 2 w0.65: J14.7@30.455,147.047 57.658,174.25 J30.14@57.658,201.625
AIN07: J14.8 J24.1 J30.16 | length 147.5
  Top Layer w0.65: J14.8@30.455,149.817 60.847,119.425 93.91,119.425 98.425,114.91 J24.1@98.425,111.836
  Layer 2 w0.65: J14.8@30.455,149.817 55.118,174.48 J30.16@55.118,201.625
AIN08: J11.1 J14.9 J30.18 | length 118.8
  Top Layer w0.65: J14.9@30.455,152.587 55.026,128.016 J11.1@80.848,128.016
  Layer 2 w0.65: J14.9@30.455,152.587 52.578,174.71 J30.18@52.578,201.625
AIN09: J14.10 J17.1 J30.20 | length 137.5
  Top Layer w0.65: J14.10@30.455,155.357 50.404,135.407 97.46,135.407 98.577,134.29 J17.1@98.577,128.016
  Layer 2 w0.65: J14.10@30.455,155.357 50.038,174.94 J30.20@50.038,201.625
AIN10: J14.11 J21.1 J30.22 | length 107
  Top Layer w0.65: J14.11@30.455,158.127 44.995,143.586 J21.1@80.848,143.586
  Layer 2 w0.65: J14.11@30.455,158.127 47.498,175.17 J30.22@47.498,201.625
AIN11: J14.12 J25.1 J30.24 | length 125.4
  Top Layer w0.65: J14.12@30.455,160.897 37.809,153.543 94.615,153.543 98.901,149.257 98.901,144.925 98.747,144.771 98.747,144.188 J25.1@98.527,143.967
  Layer 2 w0.65: J14.12@30.455,160.897 44.958,175.4 J30.24@44.958,201.625
AIN12: J12.1 J14.13 J30.26 | length 95.3
  Top Layer w0.65: J14.13@30.455,163.667 53.579,163.667 57.911,159.334 J12.1@81.077,159.334
  Layer 2 w0.65: J14.13@30.455,163.667 42.418,175.63 J30.26@42.418,201.625
AIN13: J14.14 J18.1 J30.28 | length 112.3
  Top Layer w0.65: J14.14@30.455,166.437 30.646,166.628 31.238,166.628 31.335,166.726 94.666,166.726 98.349,163.043 J18.1@98.349,159.385
  Layer 2 w0.65: J14.14@30.455,166.437 39.878,175.86 J30.28@39.878,201.625
AIN14: J14.15 J22.1 J30.30 | length 88
  Top Layer w0.65: J14.15@30.455,169.207 53.569,169.207 58.556,174.193 81.051,174.193 J22.1@81.102,174.244
  Layer 2 w0.65: J14.15@30.455,169.207 37.338,176.09 J30.30@37.338,201.625
AIN15: J14.16 J26.1 J30.32 | length 111.3
  Top Layer w0.65: J14.16@30.455,171.977 54.996,171.977 67.118,184.099 93.37,184.099 98.247,179.222 J26.1@98.247,174.244
  Layer 2 w0.65: J14.16@30.455,171.977 34.798,176.32 J30.32@34.798,201.625
D00_inp: IC2.12 J3.2 | length 35.7
  Top Layer w0.65: IC2.12@196.089,76.327 201.829,76.327 204.47,78.968 204.47,87.634 203.429,88.675 v1(203.429,88.824)
  Layer 2 w0.65: J3.2@197.256,102.159 197.256,96.749 203.429,90.576 v1(203.429,88.824)
D00_inp_B: IC7.12 J7.2 | length 67.3
  Top Layer w0.65: J7.2@149.53,118.466 163.773,132.709 164.556,132.709 178.608,146.761 178.608,163.602 182.748,167.742 IC7.12@186.562,167.742
D00_out: IC2.8 J2.1 | length 56.5
  Top Layer w0.65: 181.356,93.116 178.283,90.043 178.283,80.617 181.303,77.597 IC2.8@186.639,77.597 ; 181.486,93.497 181.644,93.655 210.078,93.655 J2.1@213.241,90.492
D00_out_B: IC7.8 J6.1 | length 28.1
  Top Layer w0.65: IC7.8@196.012,166.472 199.314,166.472 203.83,170.988 203.83,176.221 210.49,182.881 214.173,182.881 J6.1@214.224,182.83
D01_inp: IC2.14 J3.4 | length 32.4
  Top Layer w0.65: IC2.14@196.089,78.867 200.686,78.867 203.175,81.356 203.175,87.02 v1(201.625,88.57)
  Layer 2 w0.65: J3.4@194.716,102.159 194.716,97.155 201.625,90.246 v1(201.625,88.57)
D01_inp_B: IC7.14 J7.4 | length 63.3
  Top Layer w0.65: J7.4@152.07,118.466 179.558,145.954 179.558,162.094 182.666,165.202 IC7.14@186.562,165.202
D01_out: IC2.6 J2.2 | length 53
  Top Layer w0.65: IC2.6@186.639,80.137 183.116,80.137 182.7,80.553 180.203,80.553 179.68,81.077 179.68,90.043 182.342,92.705 207.793,92.705 J2.2@213.055,87.443
D01_out_B: IC7.6 J6.2 | length 29
  Top Layer w0.65: IC7.6@196.012,163.932 199.847,163.932 204.78,168.864 204.78,175.827 207.35,178.397 208.776,178.397 210.49,180.111 214.173,180.111 J6.2@214.224,180.06
D02_inp: IC2.16 J3.6 | length 28.9
  Top Layer w0.65: IC2.16@196.089,81.407 199.365,81.407 201.651,83.693 201.651,86.719 199.974,88.396 v1(199.974,88.544)
  Layer 2 w0.65: J3.6@192.176,102.159 192.176,97.815 199.974,90.018 v1(199.974,88.544)
D02_inp_B: IC7.16 J7.6 | length 59.9
  Top Layer w0.65: J7.6@154.61,118.466 180.508,144.364 180.508,160.828 182.341,162.662 IC7.16@186.562,162.662
D02_out: IC2.4 J2.3 | length 47.2
  Top Layer w0.65: IC2.4@186.639,82.677 184.943,82.677 184.911,82.646 182.505,82.646 181.331,83.82 181.331,89.687 183.398,91.755 205.973,91.755 J2.3@213.055,84.673
D02_out_B: IC7.4 J6.3 | length 30.1
  Top Layer w0.65: IC7.4@196.012,161.392 200.889,161.392 205.73,166.233 205.73,175.148 207.922,177.341 214.173,177.341 J6.3@214.224,177.29
D03_inp: IC2.18 J3.8 | length 26.7
  Top Layer w0.65: IC2.18@196.089,83.947 198.039,83.947 198.058,83.927 199.974,83.927 200.355,84.308 200.355,86.432 v1(198.397,88.389)
  Layer 2 w0.65: J3.8@189.636,102.159 189.636,98.859 198.397,90.098 v1(198.397,88.389)
D03_inp_B: IC7.18 J7.8 | length 55
  Top Layer w0.65: J7.8@157.15,118.466 181.778,143.094 181.778,157.288 184.612,160.122 IC7.18@186.562,160.122
D03_out: IC2.2 J2.4 | length 41
  Top Layer w0.65: IC2.2@186.639,85.217 183.921,85.217 183.21,85.928 183.21,88.875 185.141,90.805 204.153,90.805 J2.4@213.055,81.903
D03_out_B: IC7.2 J6.4 | length 29.6
  Top Layer w0.65: IC7.2@196.012,158.852 199.692,158.852 206.68,165.839 206.68,174.19 207.061,174.571 214.173,174.571 J6.4@214.224,174.52
D04_inp: IC2.3 J3.10 | length 22.2
  Top Layer w0.65: v1(184.404,83.871) 184.48,83.947 IC2.3@186.639,83.947
  Layer 2 w0.65: v1(184.404,83.871) 184.404,83.942 183.82,84.527 183.82,98.882 J3.10@187.096,102.159
D04_inp_B: IC7.3 J7.10 | length 65.8
  Top Layer w0.65: IC7.3@196.012,160.122 198.735,160.122 v1(198.78,160.167)
  Layer 2 w0.65: J7.10@159.69,118.466 159.69,124.104 191.465,155.88 199.126,155.88 199.507,156.261 199.507,157.826 198.78,158.552 v1(198.78,160.167)
D04_out: IC2.17 J2.5 | length 18.5
  Top Layer w0.65: IC2.17@196.089,82.677 198.495,82.677 v1(198.521,82.702)
  Layer 2 w0.65: v1(198.521,82.702) 209.486,82.702 J2.5@213.055,79.133
D04_out_B: IC7.17 J6.5 | length 55
  Top Layer w0.65: v1(182.778,161.366) 182.804,161.392 IC7.17@186.562,161.392
  Layer 2 w0.65: v1(182.778,161.366) 180.416,163.728 180.416,174.016 180.797,174.396 202.347,174.396 208.026,168.717 211.191,168.717 J6.5@214.224,171.75
D05_inp: IC2.5 J3.12 | length 24.9
  Top Layer w0.65: v1(183.579,81.407) IC2.5@186.639,81.407
  Layer 2 w0.65: v1(183.579,81.407) 183.56,81.425 183.56,82.982 182.775,83.767 182.775,100.107 184.556,101.888 J3.12@184.556,102.159
D05_inp_B: IC7.5 J7.12 | length 67.7
  Top Layer w0.65: IC7.5@196.012,162.662 198.812,162.662 v1(198.857,162.617)
  Layer 2 w0.65: J7.12@162.23,118.466 162.23,124.714 192.329,154.813 199.403,154.813 200.457,155.867 200.457,161.016 v1(198.857,162.617)
D05_out: IC2.15 J2.6 | length 18.6
  Top Layer w0.65: IC2.15@196.089,80.137 199.619,80.137 v1(199.644,80.162)
  Layer 2 w0.65: v1(199.644,80.162) 209.256,80.162 J2.6@213.055,76.363
D05_out_B: IC7.15 J6.6 | length 48.7
  Top Layer w0.65: v1(183.083,163.887) 183.128,163.932 IC7.15@186.562,163.932
  Layer 2 w0.65: v1(183.083,163.887) 181.585,165.385 181.585,172.568 182.463,173.446 201.61,173.446 207.289,167.767 213.011,167.767 J6.6@214.224,168.98
D06_inp: IC2.7 J3.14 | length 29.4
  Top Layer w0.65: v1(182.193,79.328) 182.341,79.328 182.803,78.867 IC2.7@186.639,78.867
  Layer 2 w0.65: J3.14@182.016,102.159 181.825,101.967 181.825,91.172 180.416,89.764 180.416,80.239 181.222,79.434 182.087,79.434 v1(182.193,79.328)
D06_inp_B: IC7.7 J7.14 | length 70
  Top Layer w0.65: IC7.7@196.012,165.202 198.837,165.202 v1(198.882,165.157)
  Layer 2 w0.65: J7.14@164.77,118.466 164.77,125.857 192.776,153.863 199.888,153.863 201.422,155.397 201.422,162.617 v1(198.882,165.157)
D06_out: IC2.13 J2.7 | length 18.6
  Top Layer w0.65: IC2.13@196.089,77.597 200.812,77.597 v1(200.838,77.572)
  Layer 2 w0.65: v1(200.838,77.572) 209.077,77.572 J2.7@213.055,73.593
D06_out_B: IC7.13 J6.7 | length 41.9
  Top Layer w0.65: v1(183.185,166.446) 183.21,166.472 IC7.13@186.562,166.472
  Layer 2 w0.65: v1(183.185,166.446) 183.185,171.069 184.15,172.034 201.397,172.034 207.221,166.21 J6.7@214.224,166.21
D07_inp: IC2.9 J3.16 | length 31.5
  Top Layer w0.65: v1(183.236,76.302) 184.811,76.302 184.836,76.327 IC2.9@186.264,76.327
  Layer 2 w0.65: J3.16@179.476,102.159 179.324,102.006 179.324,78.715 181.813,76.225 183.159,76.225 v1(183.236,76.302)
D07_inp_B: IC7.9 J7.16 | length 72.3
  Top Layer w0.65: IC7.9@196.012,167.742 198.78,167.742 v1(198.816,167.706)
  Layer 2 w0.65: J7.16@167.31,118.466 167.31,126.949 192.964,152.603 200.076,152.603 202.489,155.016 202.489,164.033 v1(198.816,167.706)
D07_out: IC2.11 J2.8 | length 18.7
  Top Layer w0.65: IC2.11@196.089,75.057 198.323,75.057 201.295,72.085 211.793,72.085 J2.8@213.055,70.823
D07_out_B: IC7.11 J6.8 | length 37.3
  Top Layer w0.65: IC7.11@186.562,169.012 184.404,169.012 184.023,169.392 184.023,170.561 184.404,170.942 199.55,170.942 200.617,169.875 v1(200.711,169.875)
  Layer 2 w0.65: v1(200.711,169.875) 207.146,163.44 J6.8@214.224,163.44
D08_inp: IC3.16 J3.18 | length 42.7
  Top Layer w0.65: IC3.16@155.55,83.134 155.55,82.484 155.87,82.164 155.87,81.6 160.72,76.75 161.121,76.75 v1(161.226,76.644)
  Layer 2 w0.65: v1(161.226,76.644) 163.995,76.644 176.936,89.586 J3.18@176.936,102.159
D08_inp_B: IC5.12 J7.18 | length 28.8
  Top Layer w0.65: J7.18@169.85,118.466 170.041,118.657 170.041,119.267 177.323,126.548 191.072,126.548 191.516,126.992 IC5.12@191.516,130.225
D08_out: IC3.4 J2.9 | length 76.7
  Top Layer w0.65: IC3.4@156.82,92.584 156.82,96.52 157.312,97.013 163.082,97.013 164.917,95.178 164.917,90.299 184.655,70.561 197.663,70.561 202.006,66.218 211.22,66.218 J2.9@213.055,68.053
D08_out_B: IC5.8 J6.9 | length 32.1
  Top Layer w0.65: IC5.8@192.786,139.675 192.786,143.104 210.243,160.56 214.114,160.56 J6.9@214.224,160.67
D09_in: IC3.12 J2.16 | length 78.5
  Top Layer w0.65: IC3.12@150.47,83.134 150.47,80.289 156.076,74.683 157.687,73.072 159.618,73.072 160.208,72.481 169.657,72.481 177.495,64.643 194.208,64.643 210.188,48.663 J2.16@213.055,48.663
D09_inp_B: IC5.14 J7.20 | length 30.1
  Top Layer w0.65: J7.20@172.39,118.466 172.39,120.272 177.716,125.598 193.669,125.598 194.05,125.979 194.05,128.269 194.056,128.275 IC5.14@194.056,130.225
D09_op: IC3.8 J3.20 | length 31.3
  Top Layer w0.65: IC3.8@151.74,92.584 151.74,97.409 152.12,97.79 156.746,97.79 156.919,97.963 173.401,97.963 174.396,98.958 J3.20@174.396,102.159
D09_out_B: IC5.6 J6.10 | length 28.6
  Top Layer w0.65: IC5.6@195.326,139.675 195.326,143.434 209.651,157.759 214.083,157.759 J6.10@214.224,157.9
D10_in_ex: IC3.14 J2.15 | length 74
  Top Layer w0.65: IC3.14@153.01,83.134 153.01,82.484 153.33,82.164 153.33,81.788 153.97,81.148 153.97,80.813 161.352,73.431 170.104,73.431 177.8,65.735 195.072,65.735 209.374,51.433 J2.15@213.055,51.433
D10_inp_B: IC5.16 J7.24 | length 30.1
  Top Layer w0.65: J7.24@177.47,118.466 177.47,123.726 178.392,124.648 196.215,124.648 196.596,125.029 IC5.16@196.596,130.225
D10_op: IC3.6 J3.24 | length 69.1
  Top Layer w0.65: IC3.6@154.28,92.584 v1(154.28,94.793)
  Layer 2 w0.65: v1(154.28,94.793) 154.174,94.898 153.785,94.898 153.687,94.996 146.507,94.996 146.044,94.534 146.044,81.972 150.038,77.978 163.652,77.978 166.618,80.944 166.674,80.944 167.392,81.662 167.392,81.718 169.316,83.642 J3.24@169.316,102.159
D10_out_B: IC5.4 J6.11 | length 24.8
  Top Layer w0.65: IC5.4@197.866,139.675 197.866,143.053 209.994,155.181 214.173,155.181 J6.11@214.224,155.13
D11_inp: IC3.18 J3.26 | length 31.8
  Top Layer w0.65: IC3.18@158.09,83.134 158.09,82.067 161.011,79.146 163.144,79.146 v1(166.167,82.169)
  Layer 2 w0.65: v1(166.167,82.169) 166.167,82.318 166.776,82.927 J3.26@166.776,102.159
D11_inp_B: IC5.18 J7.26 | length 30.4
  Top Layer w0.65: J7.26@180.01,118.466 180.01,123.317 180.391,123.698 198.059,123.698 198.389,124.028 198.893,124.028 199.274,124.409 199.274,128.182 199.136,128.32 IC5.18@199.136,130.225
D11_out: IC3.2 J2.10 | length 71.7
  Top Layer w0.65: IC3.2@159.36,92.584 159.36,94.945 160.477,96.063 161.951,96.063 163.967,94.046 163.967,89.906 184.353,69.52 197.355,69.52 201.607,65.268 211.614,65.268 211.629,65.283 J2.10@213.055,65.283
D11_out_B: IC5.2 J6.12 | length 20.9
  Top Layer w0.65: IC5.2@200.406,139.675 200.406,142.85 209.776,152.219 210.298,152.219 210.439,152.36 J6.12@214.224,152.36
D12_inp: IC3.3 J3.28 | length 12.1
  Top Layer w0.65: v1@158.064,95.682 v1(158.09,95.656) IC3.3@158.09,92.584
  Layer 2 w0.65: v1@158.064,95.682 159.319,96.936 159.319,97.241 J3.28@164.236,102.159
D12_inp_B: IC5.3 J7.28 | length 45.9
  Top Layer w0.65: v1(199.091,142.306) 199.136,142.261 IC5.3@199.136,139.675
  Layer 2 w0.65: J7.28@182.55,118.466 182.55,118.518 184.861,120.83 184.861,142.852 189.05,147.041 194.309,147.041 199.044,142.306 v1(199.091,142.306)
D12_out: IC3.17 J2.11 | length 67
  Top Layer w0.65: IC3.17@156.82,83.134 156.82,81.994 160.617,78.196 161.585,78.196 163.911,75.87 172.11,75.87 179.426,68.555 196.977,68.555 204.953,60.579 211.121,60.579 J2.11@213.055,62.513
D12_out_B: IC5.17 J6.13 | length 38.4
  Top Layer w0.65: IC5.17@197.866,130.225 197.866,127.533 v1(197.917,127.483)
  Layer 2 w0.65: v1(197.917,127.483) 198.061,127.483 199.103,126.441 205.054,126.441 205.435,126.822 205.435,142.672 212.404,149.641 214.173,149.641 J6.13@214.224,149.59
D13_inp: IC3.5 J3.34 | length 10
  Top Layer w0.65: IC3.5@155.55,92.584 155.55,96.52 v1(155.575,96.545)
  Layer 2 w0.65: v1(155.575,96.545) 155.575,96.69 156.616,97.731 J3.34@156.616,102.159
D13_inp_B: IC5.5 J7.34 | length 42.3
  Top Layer w0.65: IC5.5@196.596,139.675 196.596,142.576 v1(196.641,142.621)
  Layer 2 w0.65: J7.34@190.17,118.466 190.17,122.022 186.131,126.06 186.131,142.779 189.444,146.091 193.171,146.091 v1(196.641,142.621)
D13_out: IC3.15 J2.12 | length 69.3
  Top Layer w0.65: IC3.15@154.28,83.134 154.28,82.484 154.6,82.164 154.6,81.862 154.92,81.542 154.92,81.207 161.654,74.473 171.094,74.473 178.333,67.234 196.571,67.234 204.216,59.588 212.901,59.588 J2.12@213.055,59.743
D13_out_B: IC5.15 J6.14 | length 40.5
  Top Layer w0.65: v1(195.275,127.533) 195.326,127.584 IC5.15@195.326,130.225
  Layer 2 w0.65: v1(195.275,127.533) 196.789,126.02 198.181,126.02 198.709,125.491 205.448,125.491 206.578,126.621 206.578,142.215 211.141,146.777 214.181,146.777 J6.14@214.224,146.82
D14_inp: IC3.7 J3.36 | length 10.3
  Top Layer w0.65: IC3.7@153.01,92.584 153.01,96.418 v1(153.111,96.52)
  Layer 2 w0.65: v1(153.111,96.52) 153.111,96.669 154.407,97.964 154.407,101.278 154.268,101.417 154.268,101.967 J3.36@154.076,102.159
D14_inp_B: IC5.7 J7.36 | length 38.6
  Top Layer w0.65: v1(194.011,142.469) 194.056,142.424 IC5.7@194.056,139.675
  Layer 2 w0.65: J7.36@192.71,118.466 192.71,121.26 187.173,126.797 187.173,142.477 189.837,145.141 192.125,145.141 192.987,144.28 192.987,143.642 194.011,142.617 v1(194.011,142.469)
D14_out: IC3.13 J2.13 | length 74.2
  Top Layer w0.65: IC3.13@151.74,83.134 151.74,80.823 v1(157.277,75.286)
  Layer 2 w0.65: v1(157.277,75.286) 171.094,75.286 178.511,67.869 196.418,67.869 208.153,56.134 212.174,56.134 213.013,56.973 J2.13@213.055,56.973
D14_out_B: IC5.13 J6.15 | length 42.7
  Top Layer w0.65: IC5.13@192.786,130.225 192.786,127.475 v1(192.825,127.435)
  Layer 2 w0.65: v1(192.825,127.435) 193.142,127.119 193.142,126.822 194.894,125.07 197.787,125.07 198.316,124.541 205.841,124.541 207.528,126.228 207.528,141.564 210.064,144.101 214.173,144.101 J6.15@214.224,144.05
D15_inp: IC3.9 J3.38 | length 10
  Top Layer w0.65: IC3.9@150.47,92.584 150.47,100.821 151.536,101.888 J3.38@151.536,102.159
D15_inp_B: IC5.9 J7.38 | length 36.5
  Top Layer w0.65: IC5.9@191.516,139.675 191.516,143.815 v1(191.618,143.916)
  Layer 2 w0.65: v1(191.618,143.916) 189.956,143.916 188.189,142.149 188.189,127.305 192.324,123.17 194.869,123.17 195.25,122.789 J7.38@195.25,118.466
D15_out: IC3.11 J2.14 | length 79
  Top Layer w0.65: IC3.11@149.2,83.134 149.2,79.731 v1(154.813,74.117)
  Layer 2 w0.65: v1(154.813,74.117) 154.962,74.117 155.241,73.838 170.942,73.838 178.156,66.624 195.961,66.624 209.804,52.781 211.633,52.781 J2.14@213.055,54.203
D15_out_B: IC5.11 J6.16 | length 45.1
  Top Layer w0.65: v1(190.068,127.773) 190.068,127.922 190.246,128.1 IC5.11@190.246,130.225
  Layer 2 w0.65: v1(190.068,127.773) 190.068,127.717 191.397,126.388 191.397,125.616 192.893,124.12 197.394,124.12 197.922,123.591 206.235,123.591 208.509,125.865 208.509,140.95 208.889,141.331 214.173,141.331 J6.16@214.224,141.28
D16_inp: IC4.12 J5.2 | length 80.4
  Top Layer w0.65: J5.2@130.454,92.989 132.867,92.989 184.211,41.646 185.892,41.646 186.36,42.113 IC4.12@186.36,45.135